# Altium PCB flipdot.PcbDoc
Units mm, origin at the board's own origin, x right, y up, seen from the top; angles counter-clockwise.
Board outline 100 x 90 mm, 2 copper layers (Top Layer, Bottom Layer); 44 components, 124 nets, 434 pads, 69 vias.
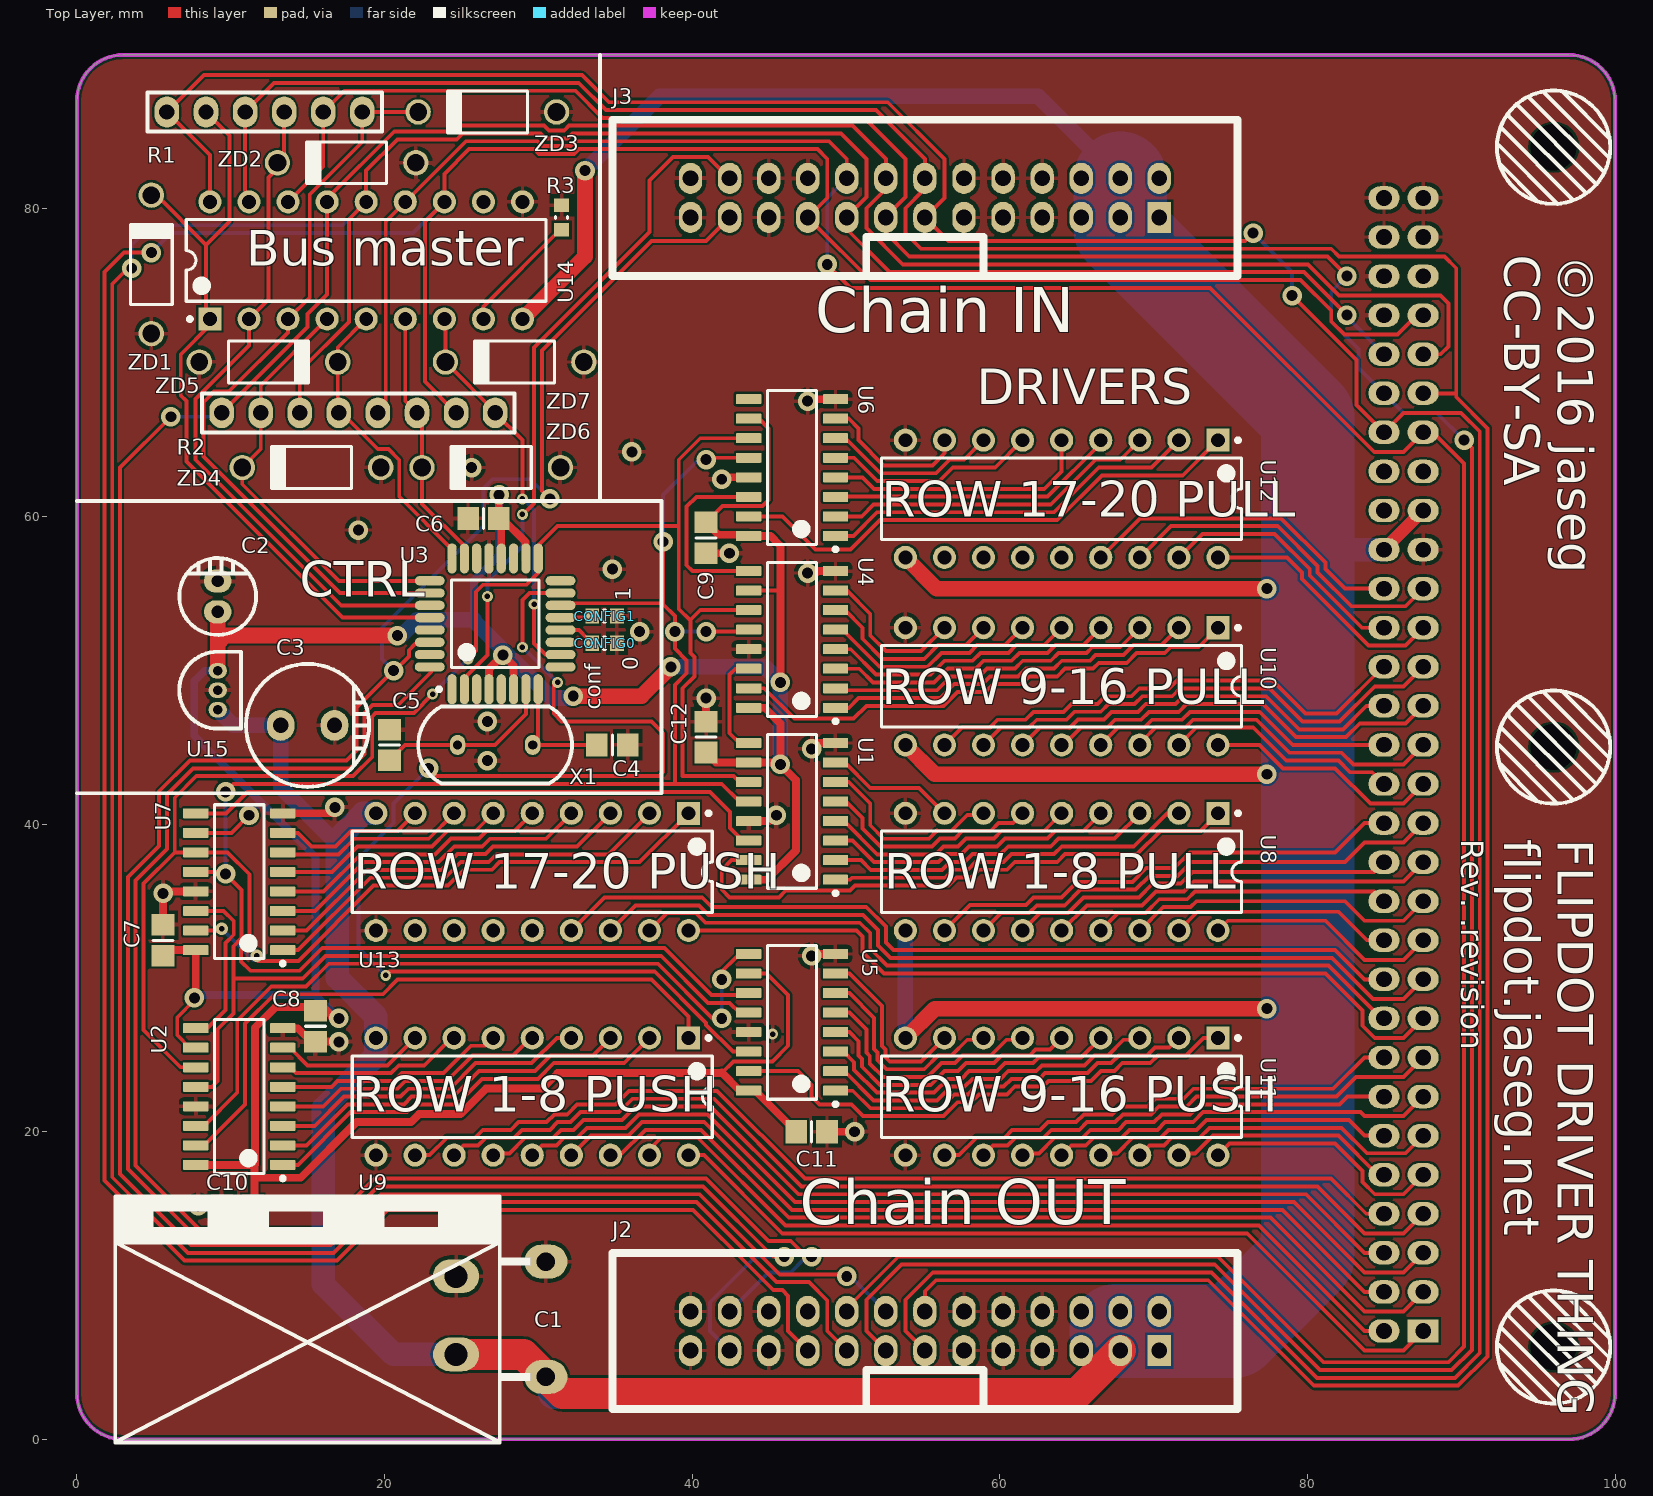
[diagram p0: Top Layer view]
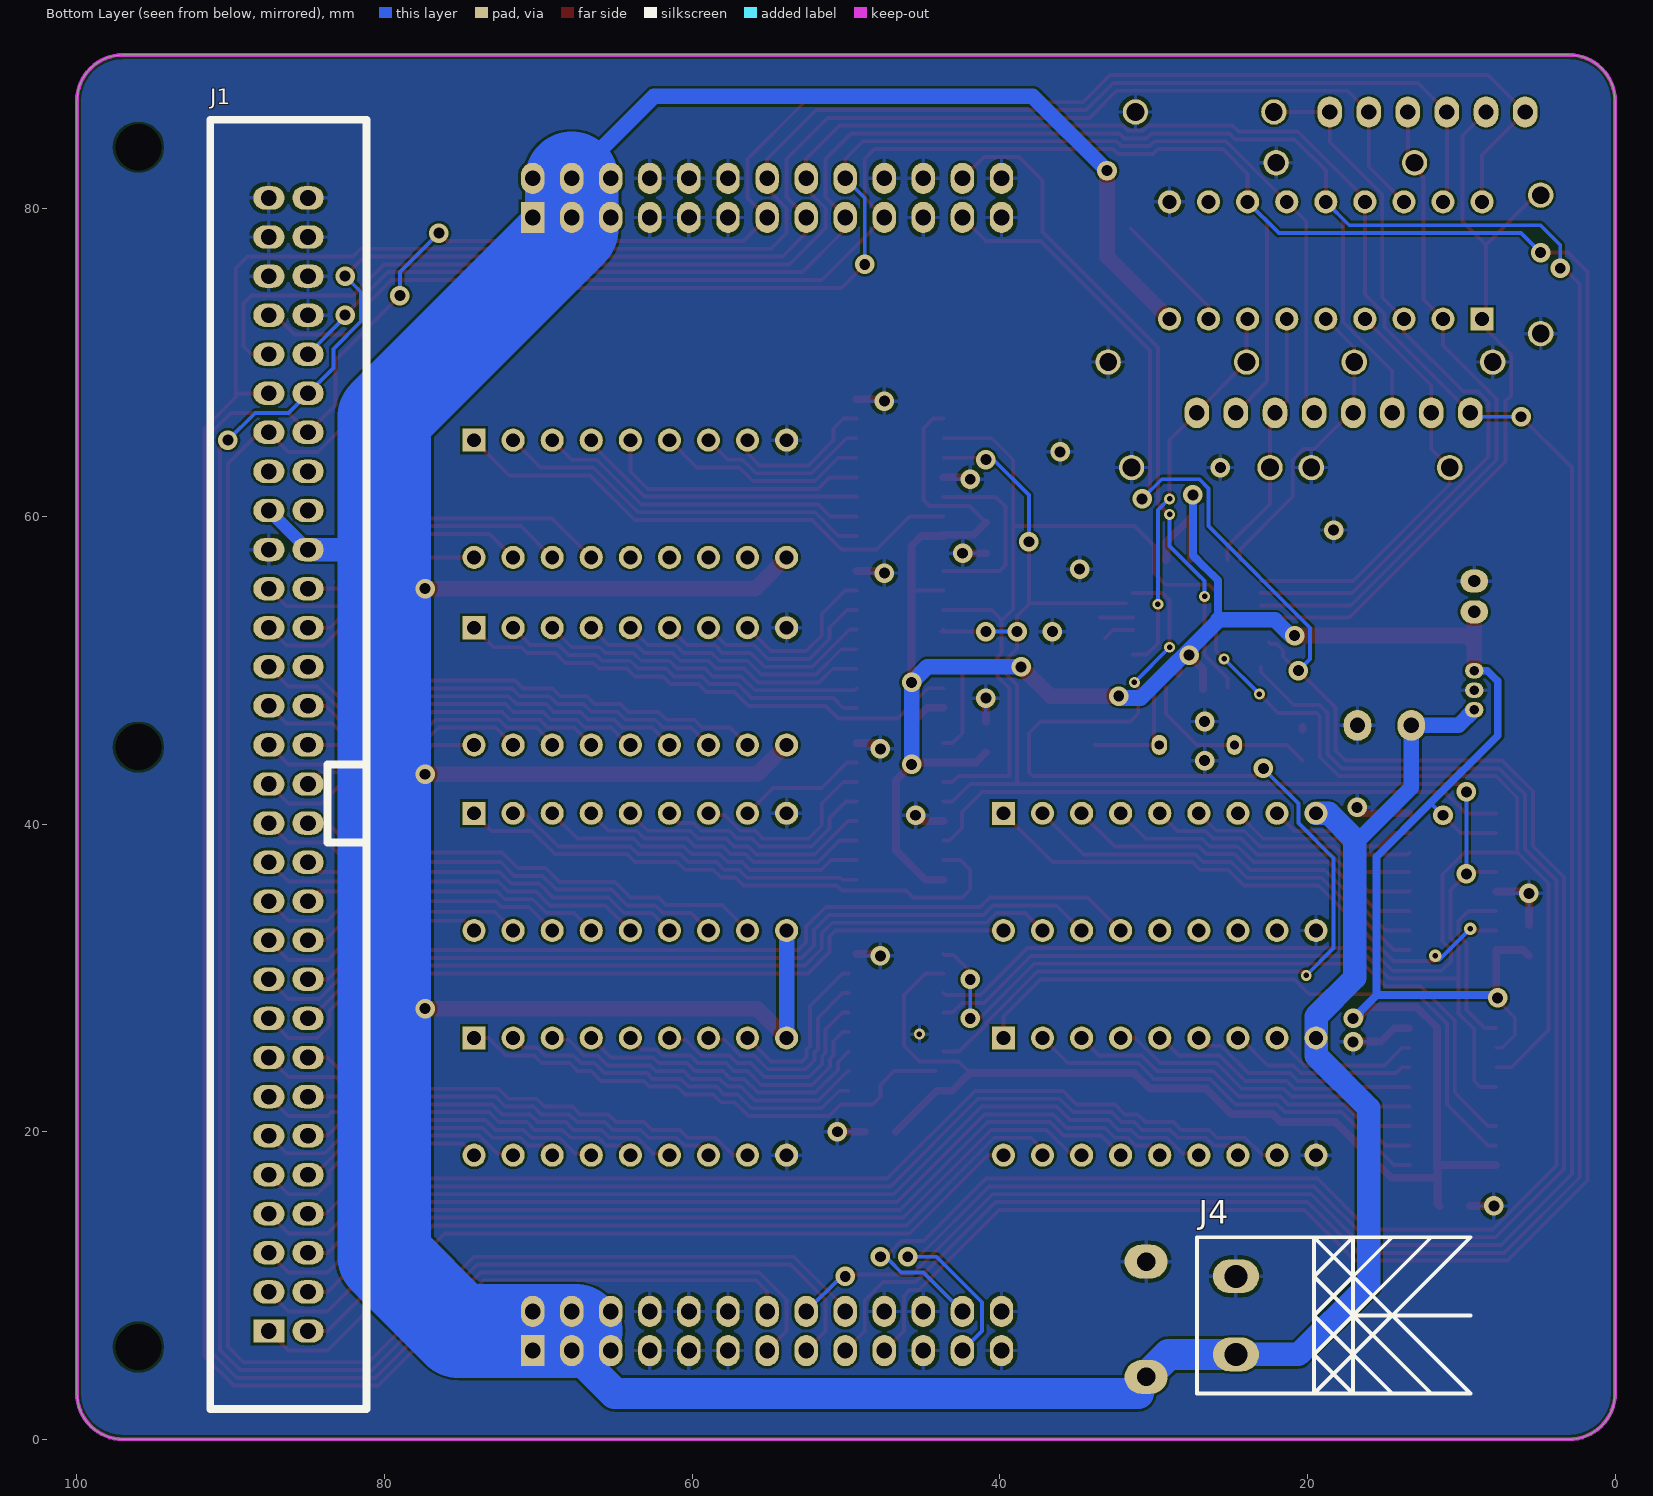
[diagram p1: Bottom Layer view, seen from below]

## Layer stack, top to bottom
Top Solder: solder mask 0.0102, Solder Resist, Dk 3.5
Top Layer: signal copper 0.0356
Dielectric1: dielectric 0.32, FR-4, Dk 4.8
Bottom Layer: signal copper 0.0356
Bottom Solder: solder mask 0.0102, Solder Resist, Dk 3.5

## Board outline
0,3 0,87 cw(c3,87) 3,90 97,90 cw(c97,87) 100,87 100,3 cw(c97,3) 97,0 3,0 cw(c3,3)

## Design rules (kind name [scope] priority, off if disabled: settings)
Clearance "VGND Polygon clearance" [InNet('VGND') AND InPoly] p1: gap=0.508
Clearance [All] p2: gap=0.152
HoleSize [All] p1: absolutevalues=TRUE maxlimit=6.35 minlimit=0.3 maxpercent=80.000 minpercent=20.000
MinimumAnnularRing AnnularRing [All] p1: minimumring=0.152
MinimumSolderMaskSliver [All] p1 off: minsoldermaskwidth=0.1
PolygonConnect [All] p1: connectstyle=Relief reliefconductorwidth=0.254 reliefentries=4 polygonreliefangle="90 Angle" airgapwidth=0.254
RoomDefinition flipdot [InComponentClass('flipdot')] p1: confinementstyle=ConfineIn formatcopy=TRUE lockcomponents=FALSE outline -101.08,-64.08 -50.28,-64.08 -50.28,-38.68 -101.08,-38.68
RoutingVias [All] p1: holewidth=0.711 width=1.27 viastyle="Through Hole" minholewidth=0.3 minwidth=0.6 maxholewidth=6.35 maxwidth=6.5
SilkToSilkClearance [All] p1 off: silktosilkclearance=0.152
SilkToSolderMaskClearance [IsPad] p1 off: minsilkscreentomaskgap=0.178 clearancetoexposedcopper=TRUE
SolderMaskExpansion [All] p1: expansion=0.13
Width SilkWidth [OnLayer('Top Overlay')] p1: maxlimit=25.4 minlimit=0.152 preferedwidth=0.254
Width HighCurrentNets [InNetClass('Power')] p2: maxlimit=6.096 minlimit=0.254 preferedwidth=0.813 minimp=50.000000 maximp=50.000000 favimp=50.000000
Width [All] p3: maxlimit=1.016 minlimit=0.152 preferedwidth=0.254 minimp=50.000000 maximp=50.000000 favimp=50.000000
26 further rules are at their usual default settings.

## Classes and differential pairs
net class Power: DVCC PGND PVCC

## Components (designator, comment, footprint, x,y, rotation, side; value= is the part's Value field where it differs from the comment)
C1 "2200u/35V" ELKO_RAD_SIDE_RM7.5_16x25 30.492,7.802 r0 top
C2 "47u/25V" ELKO_RAD_RM2.0_dia5.0 9.156,54.792 r180 top
C3 "220u/35V" ELKO_RAD_RM3.5_dia8.0 14.998,46.41 r90 top
C4 "22p" 6-0805_M 34.81,45.14 r0 top
C5 "22p" 6-0805_M 20.332,45.14 r90 top
C6 "100n" 6-0805_M 26.428,59.872 r180 top
C7 "100n" 6-0805_M 5.6,32.44 r90 top
C8 "100n" 6-0805_M 15.506,26.852 r270 top
C9 "100n" 6-0805_M 40.906,58.602 r270 top
C10 "100n" 6-0805_M 10.426,15.168 r180 top
C11 "100n" 6-0805_M 47.764,19.994 r0 top
C12 "100n" 6-0805_M 40.906,45.648 r90 top
CONFIG0 "Jumper 0603(1608)" RESC0603(1608)_N 34.302,51.744 r0 top
CONFIG1 "Jumper 0603(1608)" RESC0603(1608)_N 34.302,53.522 r180 top
J1 "Display" PINHD_2x30_100mil 86.245,42.6 r180 bottom
J2 "Chain IN" PINHD_2x13_100mil 56.4,7.04 r90 top
J3 "Chain OUT" PINHD_2x13_100mil 56.4,80.7 r90 top
J4 "CONN_PRINT_2POL" CONN_PLUG_2P_5.08 24.65,8.056 r0 bottom
R1 "100k" RNET_SIL_100mil_6P 12.204,86.288 r90 top
R2 "100k" RNET_SIL_100mil_8P 18.3,66.73 r90 top
R3 "Jumper 0603(1608)" RESC0603(1608)_N 31.508,79.43 r90 top
U1 "SN74HC595DR" D0016A_M 46.494,40.822 r180 top
U2 "SN74HC595DR" D0016A_M 10.553,22.28 r180 top
U3 "ATmega8A-AU" 32A_M 27.19,53.014 r90 top
U4 "SN74HC595DR" D0016A_M 46.494,51.998 r180 top
U5 "SN74HC595DR" D0016A_M 46.494,27.106 r180 top
U6 "SN74HC595DR" D0016A_M 46.494,63.174 r180 top
U7 "SN74HC595DR" D0016A_M 10.553,36.25 r180 top
U8 "ULN2803" PDIP-18 64.02,36.885 r270 top
U9 "UDN2981" PDIP-18 29.603,22.28 r270 top
U10 "ULN2803" PDIP-18 64.02,48.95 r270 top
U11 "UDN2981" PDIP-18 64.02,22.28 r270 top
U12 "ULN2803" PDIP-18 64.02,61.142 r270 top
U13 "UDN2981" PDIP-18 29.603,36.885 r270 top
U14 "UDN2981" PDIP-18 18.808,76.636 r90 top
U15 "LM7805" TO92 9.156,48.696 r180 top
X1 "16MHz" XTAL-HC49 27.19,45.14 r270 top
ZD1 "3.6V" FAIR-DO-41-2_V 4.838,76.382 r90 top
ZD2 "3.6V" FAIR-DO-41-2_V 17.538,82.986 r180 top
ZD3 "3.6V" FAIR-DO-41-2_V 26.682,86.288 r180 top
ZD4 "3.6V" FAIR-DO-41-2_V 15.252,63.174 r180 top
ZD5 "3.6V" FAIR-DO-41-2_V 12.458,70.032 r0 top
ZD6 "3.6V" FAIR-DO-41-2_V 26.936,63.174 r180 top
ZD7 "3.6V" FAIR-DO-41-2_V 28.46,70.032 r180 top

## Footprints (in the part's own frame and the unit in brackets; to place one, negate y for a bottom-side part, rotate by r counter-clockwise, add the part's x,y. Pads: shape width x height; smd on the part's side, far side on the other; paste and mask are expansions set on the pad)
6-0805_M [mm] "Chip Resistor, Body 2.0x1.2mm, IPC Low Density"
  rect 1.4x1.5 smd: 1(-1,0) 2(1,0)
  silkscreen extent 0,-0.65 0,0.65, body extent -1.07,-0.7 1.07,0.7, height 0.7
32A_M [mm] "Thin QFP, 32-Leads, Body 7x7mm, Pitch 0.8mm, IPC Low Density"
  oval 1.95x0.6 smd: 1(-4.25,2.8) 2(-4.25,2) 3(-4.25,1.2) 4(-4.25,0.4) 5(-4.25,-0.4) 6(-4.25,-1.2) 7(-4.25,-2) 8(-4.25,-2.8) 17(4.25,-2.8) 18(4.25,-2) 19(4.25,-1.2) 20(4.25,-0.4) 21(4.25,0.4) 22(4.25,1.2) 23(4.25,2) 24(4.25,2.8)
  oval 0.6x1.95 smd: 9(-2.8,-4.25) 10(-2,-4.25) 11(-1.2,-4.25) 12(-0.4,-4.25) 13(0.4,-4.25) 14(1.2,-4.25) 15(2,-4.25) 16(2.8,-4.25) 25(2.8,4.25) 26(2,4.25) 27(1.2,4.25) 28(0.4,4.25) 29(-0.4,4.25) 30(-1.2,4.25) 31(-2,4.25) 32(-2.8,4.25)
  silkscreen extent -4.37,-2.85 2.85,3.77, body extent -3.5,-3.5 3.5,3.5, height 1.2
CONN_PLUG_2P_5.08 [mm]
  oval 3x2.2 hole 1.5: 1(0,2.54) 2(0,-2.54)
  silkscreen extent -15.24,-5.08 2.54,5.08
D0016A_M [mm] "SOIC, 16-Leads, Body 10x4mm, Pitch 1.27mm, IPC Low Density"
  rrect15% 1.65x0.65 smd: 1(-2.825,4.445) 2(-2.825,3.175) 3(-2.825,1.905) 4(-2.825,0.635) 5(-2.825,-0.635) 6(-2.825,-1.905) 7(-2.825,-3.175) 8(-2.825,-4.445) 9(2.825,-4.445) 10(2.825,-3.175) 11(2.825,-1.905) 12(2.825,-0.635) 13(2.825,0.635) 14(2.825,1.905) 15(2.825,3.175) 16(2.825,4.445)
  silkscreen extent -2.95,-5 1.6,5.44, body extent -3,-4.95 3,4.95, height 1.59
ELKO_RAD_RM2.0_dia5.0 [mm] "Elko Radial RM2.0, 5.0mm diameter"
  oval 1.8x1.5 hole 0.8 mask+0.102: N(0,-1)
  oval 1.8x1.5 hole 0.8: P(0,1)
  silkscreen extent -2.5,-2.5 2.5,2.5
ELKO_RAD_RM3.5_dia8.0 [mm] "Elko Radial RM3.5, 8.0mm diameter"
  oval 2x1.8 hole 1 mask+0.102: N(0,-1.75)
  oval 2x1.8 hole 1: P(0,1.75)
  silkscreen extent -4,-4 4,4
ELKO_RAD_SIDE_RM7.5_16x25 [mm] "Elko RM7.5mm Radial, Mounted sideways, Body size 16mm(dia) *25mm(l)"
  oval 2.8x2.2 hole 1.2: N(0,3.75) P(0,-3.75)
  silkscreen extent -28,-8 -1,8
FAIR-DO-41-2_V [mm] "2-Leads, Axial leaded, Body 2.72x5.2mm, Pin Spacing 9mm"
  round 1.65 hole 1.15: 1(-4.5,0) 2(4.5,0)
  silkscreen extent -2.6,-1.36 2.6,1.36, body extent -4.93,-1.36 4.93,1.36, height 2.71
PDIP-18 [mm] "DIP, 18-Leads, Row Spacing 7.62mm, Pitch 2.54mm, Body 22.5x6.4mm"
  rect 1.5x1.5 hole 0.9: 1(-3.81,10.16)
  round 1.5 hole 0.9: 2(-3.81,7.62) 3(-3.81,5.08) 4(-3.81,2.54) 5(-3.81,0) 6(-3.81,-2.54) 7(-3.81,-5.08) 8(-3.81,-7.62) 9(-3.81,-10.16) 10(3.81,-10.16) 11(3.81,-7.62) 12(3.81,-5.08) 13(3.81,-2.54) 14(3.81,0) 15(3.81,2.54) 16(3.81,5.08) 17(3.81,7.62) 18(3.81,10.16)
  silkscreen extent -3.93,-11.7 2.65,11.7, body extent -3.3,-11.68 3.3,11.68, height 5.08
PINHD_2x13_100mil [mil] "2x13p 100mil Pin Header"
  rect 80x60 hole 40: 1(-50,-550)
  oval 80x60 hole 40: 2(50,-550) 3(-50,-450) 4(50,-450) 5(-50,-350) 6(50,-350) 7(-50,-250) 8(50,-250) 9(-50,-150) 10(50,-150) 11(-50,-50) 12(50,-50) 13(-50,50) 14(50,50) 15(-50,150) 16(50,150) 17(-50,250) 18(50,250) 19(-50,350) 20(50,350) 21(-50,450) 22(50,450) 23(-50,550) 24(50,550) 25(-50,650) 26(50,650)
  silkscreen extent -200,-750 200,850
PINHD_2x30_100mil [mil] "2x30p 100mil Pin Header"
  rect 80x60 hole 40: 1(-50,-1400)
  oval 80x60 hole 40: 2(50,-1400) 3(-50,-1300) 4(50,-1300) 5(-50,-1200) 6(50,-1200) 7(-50,-1100) 8(50,-1100) 9(-50,-1000) 10(50,-1000) 11(-50,-900) 12(50,-900) 13(-50,-800) 14(50,-800) 15(-50,-700) 16(50,-700) 17(-50,-600) 18(50,-600) 19(-50,-500) 20(50,-500) 21(-50,-400) 22(50,-400) 23(-50,-300) 24(50,-300) 25(-50,-200) 26(50,-200) 27(-50,-100) 28(50,-100) 29(-50,0) 30(50,0) 31(-50,100) 32(50,100) 33(-50,200) 34(50,200) 35(-50,300) 36(50,300) 37(-50,400) 38(50,400) 39(-50,500) 40(50,500) 41(-50,600) 42(50,600) 43(-50,700) 44(50,700) 45(-50,800) 46(50,800) 47(-50,900) 48(50,900) 49(-50,1000) 50(50,1000) 51(-50,1100) 52(50,1100) 53(-50,1200) 54(50,1200) 55(-50,1300) 56(50,1300) 57(-50,1400) 58(50,1400) 59(-50,1500) 60(50,1500)
  silkscreen extent -200,-1600 200,1700
RESC0603(1608)_N [mm] "Chip Resistor, Body 1.6x0.8mm, IPC Medium Density"
  rect 0.9x1 smd: 1(-0.8,0) 2(0.8,0)
  silkscreen extent -0.05,-0.4 0.05,0.4, body extent -0.85,-0.47 0.85,0.47, height 0.6
RNET_SIL_100mil_6P [mm] "Resistor network, SIL package, 100mil pin pitch, 6 pin"
  oval 2x1.6 hole 1: 1(0,6.35) 2(0,3.81) 3(0,1.27) 4(0,-1.27) 5(0,-3.81) 6(0,-6.35)
  silkscreen extent -1.27,-7.62 1.27,7.62
RNET_SIL_100mil_8P [mm] "Resistor network, SIL package, 100mil pin pitch, 8 pin"
  oval 2x1.6 hole 1: 1(0,8.89) 2(0,6.35) 3(0,3.81) 4(0,1.27) 5(0,-1.27) 6(0,-3.81) 7(0,-6.35) 8(0,-8.89)
  silkscreen extent -1.27,-10.16 1.27,10.16
TO92 [mm]
  oval 1.2x1 hole 0.6: 1(0,1.27) 2(0,0) 3(0,-1.27)
  silkscreen extent -1.5,-2.5 2.5,2.5
XTAL-HC49 [mm] "HC49 Crystal Package"
  oval 1.3x1 hole 0.6: 1(0,2.44) 2(0,-2.44)
  silkscreen extent -2.5,-5 2.5,5

## Part data
C1 C2 C3: library part CP, "Electrolytic Capacitor"
C4 C5 C6 C7 C8 C9 C10 C11 C12: library part CCer, "Ceramic Capacitor"
CONFIG0 CONFIG1 R3: library part CMP-1012-00001-1, "Jumper 0603 (1608 Metric)"
J1: library part PINHD_2x30
J2 J3: library part PINHD_2x13
R1: library part Rnet_Parallel_6, "6-pin Parallel Resistor Network"
R2: library part Rnet_Parallel_8, "8-pin Parallel Resistor Network"
U1 U2 U4 U5 U6 U7: library part CMP-0780-00037-3, "8-Bit Shift Registers With 3-State Output Registers, D0016A, LARGE T&R"
U3: library part CMP-0095-00219-1, "8-bit AVR Microcontroller, 8KB Flash, 512 Bytes EEPROM, 1KB SRAM, 32-pin TQFP, Industrial Grade (-40°C to 85°C)"
U8 U10 U12: "ULN2803 Octal Darlington Sink Driver"
U9 U11 U13 U14: "UDN2981 Octal Darlington Source Driver/Level Shifter"
U15: "5V Linear Regulator"
X1: library part XTAL
ZD1 ZD2 ZD3 ZD4 ZD5 ZD6 ZD7: library part CMP-0892-00009-1, "Zener Diode, 5.6V, 1W, 5%, -65 to 200 degC, 2-Pin DO-41, Body 2.72 x 5.2 mm, RoHS"

## Free pads (board coordinates)
  round 2.032 hole 3 unplated: 75(96,6) 75(96,45) 75(96,84)

## Via types
v1: diameter 1.27, hole 0.711, Top Layer to Bottom Layer, tented top, 56 vias
v2: diameter 0.711, hole 0.356, Top Layer to Bottom Layer, tented top, 10 vias
v3: diameter 0.813, hole 0.356, Top Layer to Bottom Layer, tented top, 2 vias
v4: diameter 1.27, hole 0.711, Top Layer to Bottom Layer, 1 vias

## Nets (pads, with @x,y where several pads share a name; then routed paths per layer and width w, separated by ;. In a path a pad name is that pad's centre, name@x,y a point inside that pad or via, vN(x,y) a via of type N, cw(c..) or ccw(c..) an arc to the next point about the centre after c; other vN are vias at no path point)
5V: J1.45
A0: R1.2 U3.28 U14.1 ZD1.2 | length 50
  Top Layer w0.254: ZD1.2 5.164,80.882 8.394,77.652 ; R1.2 9.918,84.764 9.918,79.176 8.394,77.652 ; U3.28@23.04,53.414 17.269,53.414 7.124,63.559 7.124,67.492 6.752,67.864 6.752,70.532 8.648,72.428 U14.1 8.394,73.08 8.394,77.652
A0_24V: J1.48 J2.13 J3.13 R1.1 U14.18 | length 216.4
  Top Layer w0.254: U14.18 8.648,83.494 R1.1 8.251,88.685 32.834,88.685 34.596,86.923 52.717,86.923 56.4,83.24 56.4,80.7 J3.13 56.654,77.906 75.958,77.906 v1(76.466,78.414) ; J2.13 53.86,7.04 53.86,9.072 55.638,10.85 73.759,10.85 80.617,3.992 89.587,3.992 91.198,5.603 91.198,65.504 89.972,66.73 86.245,66.73 J1.48 83.197,67.238 83.197,70.159 v1(79.006,74.35)
  Bottom Layer w0.254: v1(76.466,78.414) 79.006,75.874 v1(79.006,74.35)
A1: R1.4 U3.27 U14.2 ZD2.2 | length 44.2
  Top Layer w0.254: R1.4 13.474,83.058 12.458,82.042 12.458,74.096 U14.2 11.188,71.097 7.721,67.63 7.721,63.68 17.187,54.214 U3.27@23.04,54.214
A1_24V: J1.49 J2.14 J3.14 R1.3 U14.17 | length 210.6
  Top Layer w0.254: U14.17 10.934,80.7 R1.3 12.823,88.177 32.623,88.177 34.385,86.415 51.955,86.415 55.13,83.24 J3.14 55.13,81.208 55.038,81.208 53.86,80.03 53.86,78.414 54.876,77.398 81.546,77.398 82.054,76.89 88.912,76.89 89.674,76.128 89.674,68 ; J2.14 55.13,9.624 55.848,10.342 73.549,10.342 80.407,3.484 89.797,3.484 91.706,5.393 91.706,65.714 89.674,67.746 89.674,68 ; J1.49@87.564,68 89.674,68
A2: R1.6 U3.26 U14.3 ZD3.2 | length 49.3
  Top Layer w0.254: ZD3.2 R1.6 18.554,84.331 15.137,80.914 15.137,74.235 U14.3 13.728,71.965 9.874,68.111 8.921,68.111 8.229,67.419 8.229,63.891 17.106,55.014 U3.26@23.04,55.014
A2_24V: J1.50 J2.15 J3.15 R1.5 U14.16 | length 206.3
  Top Layer w0.254: U14.16 16.014,82.732 R1.5 17.395,87.669 32.413,87.669 34.175,85.907 51.193,85.907 53.86,83.24 53.86,80.749 52.59,79.479 J3.15 52.59,78.414 54.114,76.89 81.292,76.89 v1(82.562,75.62) ; J2.15 51.32,7.04 51.32,9.072 53.606,11.358 73.97,11.358 80.828,4.5 89.376,4.5 90.69,5.814 90.69,64.444 v1(90.182,64.952)
  Bottom Layer w0.254: v1(82.562,75.62) 81.546,74.604 81.546,72.659 83.324,70.881 83.324,69.651 J1.50 86.245,66.73 88.404,66.73 v1(90.182,64.952)
B0: R2.2 U3.25 U14.4 ZD4.2 | length 27.9
  Top Layer w0.254: U14.4 11.95,68.508 R2.2 11.95,64.372 ZD4.2 10.752,62.086 17.03,55.808 23.034,55.808 U3.25@23.04,55.814
B0_24V: J1.51 J2.16 J3.16 R2.1 U14.15 | length 216
  Top Layer w0.254: v1(6.108,66.476) 2.806,63.174 2.806,17.244 7.422,12.628 16.478,12.628 19.78,15.93 40.485,15.93 44.97,11.445 45.692,10.723 49.923,10.723 v1(50.05,10.596) ; R2.1 14.998,72.318 14.998,73.155 16.268,74.425 U14.15 16.268,80.656 20.63,85.018 24.483,85.018 24.864,85.399 30.365,85.399 30.682,85.082 31.682,85.082 31.999,85.399 50.431,85.399 52.59,83.24 J3.16 52.59,81.3 51.32,80.03 51.32,78.751 53.689,76.382 80.022,76.382 82.054,74.35 88.658,74.35 89.166,73.842 89.166,71.048 88.658,70.54 J1.51
  Bottom Layer w0.254: v1(6.108,66.476) 9.156,66.476 R2.1 ; v1(50.05,10.596) 50.304,10.596 J2.16
B1: R2.4 U3.24 U14.5 ZD5.2 | length 20.2
  Top Layer w0.254: R2.4 16.958,66.802 R2.4@16.958,66.984 ; U14.5 16.958,70.976 ZD5.2 R2.4@16.958,66.984 ; U3.24@24.39,57.164 24.39,57.846 20.958,61.278 20.958,63.674 20.252,64.38 19.562,64.38 R2.4@16.958,66.984
B1_24V: J1.52 J2.17 J3.17 R2.3 U14.14 | length 229.8
  Top Layer w0.254: v1(3.568,76.128) 3.568,76.382 2.298,75.112 2.298,17.033 7.211,12.12 16.689,12.12 19.991,15.422 40.275,15.422 44.462,11.235 45.482,10.215 47.593,10.215 48.78,9.028 48.78,7.04 J2.17 ; R2.3 14.49,69.449 17.677,72.636 17.677,79.315 U14.14 18.808,82.478 20.84,84.51 24.694,84.51 25.075,84.891 30.155,84.891 30.472,84.574 31.892,84.574 32.209,84.891 49.669,84.891 51.32,83.24 51.32,80.749 50.05,79.479 J3.17 50.05,78.663 52.839,75.874 79.768,75.874 v1(82.562,73.08)
  Bottom Layer w0.254: v1(3.568,76.128) 3.568,77.652 4.838,78.922 17.284,78.922 U14.14 ; v1(82.562,73.08) 82.562,72.953 J1.52
DATA_24V: J1.47 J2.18 J3.18 R2.5 U14.13 | length 203.1
  Top Layer w0.254: R2.5 20.078,67.238 20.078,79.176 U14.13 25.285,84.383 29.945,84.383 30.262,84.066 32.102,84.066 32.419,84.383 48.907,84.383 50.05,83.24 J3.18 ; v1(48.78,76.382) 50.304,74.858 73.672,74.858 84.34,64.19 86.245,64.19 J1.47 88.15,65.46 90.182,63.428 90.182,6.024 89.166,5.008 81.038,5.008 74.18,11.866 53.396,11.866 50.05,8.52 J2.18
  Bottom Layer w0.254: v1(48.78,76.382) 48.78,80.7 J3.18
DVCC: C2.P C6.1 C7.1 C8.1 C9.1 C10.1 C11.1 C12.1 U1.10 U1.16 U2.10 U2.16 U3.4 U3.6 U3.18 U3.20 U4.10 U4.16 U5.10 U5.16 U6.10 U6.16 U7.10 U7.16 U15.3 | length 240.5
  Top Layer w0.254: v1(7.632,28.692) 7.632,28.541 6.522,27.431 6.522,26.271 7.338,25.455 U2.10 ; U7.10 10.045,39.425 v1(11.188,40.568) ; C9.1 41.969,60.665 44.581,60.665 44.97,61.053 44.97,65.714 44.335,66.349 U6.10 ; 41.922,23.804 42.684,24.566 45.224,24.566 46.24,25.582 46.24,28.884 44.843,30.281 U5.10 ; U4.10 45.605,55.173
  Top Layer w0.508: C7.1 5.965,31.805 U7.16 7.728,28.788 v1(7.632,28.692) ; U2.16 11.538,17.835 ; C10.1 11.538,15.28 11.538,17.104 ; v1@16.59,27.441 16.679,27.441 16.014,28.106 12.919,28.106 11.569,26.756 11.569,17.866 11.538,17.835 ; U3.4 26.79,50.074 v1(27.698,50.982) 28.39,50.29 28.39,49.782 ; v1(27.444,61.396) 27.428,61.38 C6.1 ; U3.20 27.59,59.71 C6.1 ; U3.18@29.19,57.164 29.173,57.181 29.173,58.329 27.63,59.872 C6.1 ; C12.1 41.557,43.997 U1.10 v1@45.732,43.997 ; C9.1 41.698,58.81 43.669,58.81 U6.16 45.097,58.729 45.732,58.094 v1(45.732,49.204) ; U1.16 44.843,36.377 46.748,38.282 46.748,42.854 v1(45.732,43.87) 45.732,46.537 44.716,47.553 U4.16 ; C11.1 44.097,22.661 U5.16 43.099,22.661 41.939,23.821 41.922,23.838 41.922,23.804 31.251,23.804 30.247,22.8 26.604,22.8 24.941,21.137 22.239,21.137 21.731,20.629 18.173,20.629 14.546,17.002 11.64,17.002 11.538,17.104 ; 11.538,17.104 11.538,17.835
  Top Layer w1.016: U15.3 9.156,51.744 ; C2.P 9.156,51.744 ; v1(20.84,52.252) 9.664,52.252 9.156,51.744 ; v1(32.27,48.315) 36.715,48.315 v1(38.62,50.22)
  Bottom Layer w0.254: v1(11.188,40.568) 11.996,41.376 12.042,41.33
  Bottom Layer w0.508: v1(7.632,28.692) 7.824,28.884 15.506,28.884 ; U15.3 8.31,49.966 7.632,49.288 7.632,45.74 11.996,41.376 ; 12.042,41.33 15.506,37.866 15.506,28.884 ; v1@16.59,27.441 16.59,27.8 15.506,28.884 ; 25.818,53.268 25.818,55.842 26.673,56.697 26.691,56.697 27.444,57.45 v1(27.444,61.396)
  Bottom Layer w1.016: v1(20.84,52.252) 21.094,52.252 22.11,53.268 25.609,53.268 ; 25.818,53.268 25.818,53.203 30.833,48.188 32.143,48.188 v1(32.27,48.315) ; v1(38.62,50.22) 44.716,50.22 v1(45.732,49.204) v1(45.732,43.87)
  other v1: 17.03,27.36
FP2800_DATA: R2.8 U3.10 U14.7 ZD7.2 | length 25.4
  Top Layer w0.254: U14.7 23.96,72.754 ZD7.2 27.19,66.802 R2.8 28.968,64.952 v2(28.968,61.142) ; v2(29.73,54.284) 29.73,51.744 30.46,51.014 U3.10@31.34,51.014
  Bottom Layer w0.254: v2(28.968,61.142) 28.994,61.142 29.73,60.406 v2(29.73,54.284)
FP2800_STROBE: R2.6 U3.23 U14.6 ZD6.2 | length 17.3
  Top Layer w0.254: U14.6 21.348,67.492 R2.6 22.436,66.404 ZD6.2 22.436,60.816 25.19,58.062 U3.23@25.19,57.164
MISO: U3.16
MOSI: U3.15 U5.14 | length 78.9
  Top Layer w0.254: v2(20.078,30.154) 20.332,30.408 37.568,30.408 40.906,27.07 40.906,26.939 42.644,25.201 U5.14 ; v1(22.872,43.616) 23.38,43.108 37.858,43.108 38.112,43.362 38.112,45.902 37.35,46.664 31.508,46.664 31,47.172 31,49.204 v2(31.254,49.204) ; v2(28.968,51.49) 28.968,54.564 29.425,55.021 31.333,55.021 U3.15@31.34,55.014
  Bottom Layer w0.254: v2(20.078,30.154) 18.3,31.932 18.3,37.774 20.586,40.06 20.586,41.33 v1(22.872,43.616) ; v2(28.968,51.49) v2(31.254,49.204)
NetC4_1: C4.1 U3.8 X1.1 | length 8.1
  Top Layer w0.254: U3.8@29.99,48.864 29.99,45.5 X1.1 C4.1
NetC5_1: C5.1 U3.7 X1.2 | length 11.8
  Top Layer w0.254: C5.1 21.332,45.14 X1.2 27.19,45.14 29.19,47.14 U3.7@29.19,48.864
NetCONFIG0_1: CONFIG0.1 U3.12 | length 2.1
  Top Layer w0.254: U3.12@31.34,52.614 32.632,52.614 CONFIG0.1@33.171,52.075
NetCONFIG1_2: CONFIG1.2 U3.13 | length 2.2
  Top Layer w0.254: U3.13@31.34,53.414 CONFIG1.2@33.502,53.414
NetR3_1: R3.1 U14.8 | length 8
  Top Layer w0.254: U14.8 26.428,73.65 R3.1@31.508,78.73
NetU1_1: U1.1 U8.2 | length 24.1
  Top Layer w0.254: U1.1 50.261,36.377 50.388,36.504 56.444,36.504 56.964,37.024 57.921,37.024 58.429,37.532 60.25,37.532 60.758,38.04 63.52,38.04 64.028,38.548 64.444,38.548 64.447,38.546 68.709,38.546 70.859,40.695 U8.2
NetU1_2: U1.2 U8.3 | length 21.6
  Top Layer w0.254: U1.2 50.974,37.647 51.609,37.012 56.233,37.012 56.753,37.532 57.71,37.532 58.218,38.04 60.04,38.04 60.548,38.548 63.31,38.548 63.818,39.056 64.655,39.056 64.657,39.054 67.459,39.054 U8.3
NetU1_3: U1.3 U8.4 | length 19.1
  Top Layer w0.254: U1.3 50.422,38.917 51.819,37.52 56.023,37.52 56.543,38.04 57.5,38.04 58.008,38.548 59.829,38.548 60.337,39.056 63.099,39.056 63.607,39.564 64.865,39.564 64.868,39.562 65.427,39.562 U8.4
NetU1_4: U1.4 U8.5 | length 16.7
  Top Layer w0.254: U1.4 49.871,40.187 52.03,38.028 55.812,38.028 56.332,38.548 57.289,38.548 57.797,39.056 59.619,39.056 60.127,39.564 62.889,39.564 U8.5
NetU1_5: U1.5 U8.6 | length 14.7
  Top Layer w0.254: U1.5 50.006,41.457 51.066,40.397 51.066,39.71 52.24,38.536 55.602,38.536 56.122,39.056 57.079,39.056 57.587,39.564 59.408,39.564 59.916,40.072 60.857,40.072 U8.6
NetU1_6: U1.6 U8.7 | length 12.7
  Top Layer w0.254: U1.6 50.177,42.727 51.574,41.33 51.574,39.92 52.45,39.044 55.391,39.044 55.922,39.574 55.932,39.564 56.868,39.564 57.884,40.58 58.825,40.58 U8.7
NetU1_7: U1.7 U8.8 | length 8.4
  Top Layer w0.254: U1.7 49.923,43.997 51.574,42.346 54.749,42.346 U8.8
NetU1_15: U1.15 U8.1 | length 38
  Top Layer w0.254: U1.15 42.557,37.647 41.922,37.012 41.922,35.742 42.43,35.234 45.645,35.234 46.082,35.671 50.273,35.671 50.598,35.996 56.654,35.996 57.174,36.516 58.131,36.516 58.639,37.024 60.461,37.024 60.969,37.532 63.731,37.532 64.236,38.038 68.92,38.038 70.434,39.552 73.037,39.552 U8.1
NetU2_1: U2.1 U9.2 | length 27.3
  Top Layer w0.254: U2.1 14.363,17.835 17.792,21.264 21.468,21.264 21.976,21.772 24.678,21.772 26.341,23.435 29.984,23.435 31,24.451 35.584,24.451 U9.2
NetU2_2: U2.2 U9.3 | length 24.2
  Top Layer w0.254: U2.2 14.915,19.105 17.582,21.772 21.257,21.772 21.765,22.28 24.468,22.28 26.131,23.943 29.774,23.943 30.79,24.959 33.552,24.959 U9.3
NetU2_3: U2.3 U9.4 | length 21.1
  Top Layer w0.254: U2.3 15.466,20.375 17.371,22.28 21.047,22.28 21.555,22.788 24.257,22.788 25.92,24.451 29.563,24.451 31.202,26.09 U9.4
NetU2_4: U2.4 U9.5 | length 18.1
  Top Layer w0.254: U2.4 16.018,21.645 17.161,22.788 20.836,22.788 21.344,23.296 24.047,23.296 25.71,24.959 28.36,24.959 29.491,26.09 U9.5
NetU2_5: U2.5 U9.6 | length 15
  Top Layer w0.254: U2.5 16.569,22.915 16.95,23.296 20.626,23.296 21.134,23.804 23.836,23.804 25.614,25.582 26.555,25.582 U9.6
NetU2_6: U2.6 U9.7 | length 12.2
  Top Layer w0.254: U2.6 13.855,24.185 14.236,23.804 20.415,23.804 20.923,24.312 22.582,24.312 24.36,26.09 U9.7
NetU2_7: U2.7 U9.8 | length 9.8
  Top Layer w0.254: U2.7 13.855,25.455 14.998,24.312 20.205,24.312 U9.8
NetU2_15: U2.15 U9.1 | length 42
  Top Layer w0.254: U2.15 8.267,19.105 10.934,21.772 10.934,27.019 12.848,28.933 19.899,28.933 20.815,29.849 20.815,29.875 20.84,29.9 37.357,29.9 39.763,27.494 U9.1
NetU4_1: U4.1 U10.2 | length 24.5
  Top Layer w0.254: U4.1 50.177,47.553 50.812,48.188 56.139,48.188 57.04,49.089 58.861,49.089 59.369,49.597 61.191,49.597 61.699,50.105 63.52,50.105 64.028,50.613 65.85,50.613 66.219,50.982 68.04,50.982 68.687,51.629 70.509,51.629 U10.2
NetU4_2: U4.2 U10.3 | length 21.5
  Top Layer w0.254: U4.2 49.446,48.696 55.928,48.696 56.829,49.597 58.651,49.597 59.159,50.105 60.98,50.105 61.488,50.613 63.31,50.613 63.818,51.121 65.639,51.121 66.008,51.49 67.83,51.49 U10.3
NetU4_3: U4.3 U10.4 | length 19.1
  Top Layer w0.254: U4.3 50.859,50.093 51.748,49.204 55.718,49.204 56.619,50.105 58.44,50.105 58.948,50.613 60.77,50.613 61.278,51.121 63.099,51.121 63.607,51.629 65.429,51.629 U10.4
NetU4_4: U4.4 U10.5 | length 16.6
  Top Layer w0.254: U4.4 50.308,51.363 51.959,49.712 55.507,49.712 56.408,50.613 58.23,50.613 58.738,51.121 60.559,51.121 61.067,51.629 62.889,51.629 U10.5
NetU4_5: U4.5 U10.6 | length 14.2
  Top Layer w0.254: U4.5 49.756,52.633 52.169,50.22 55.297,50.22 56.198,51.121 58.019,51.121 58.527,51.629 60.349,51.629 U10.6
NetU4_6: U4.6 U10.7 | length 12.2
  Top Layer w0.254: U4.6 49.923,53.903 51.066,52.76 51.066,52.042 52.38,50.728 55.086,50.728 55.987,51.629 57.809,51.629 U10.7
NetU4_7: U4.7 U10.8 | length 10.2
  Top Layer w0.254: U4.7 50.062,55.173 51.574,53.661 51.574,52.252 52.59,51.236 54.876,51.236 U10.8
NetU4_15: U4.15 U10.1 | length 33.8
  Top Layer w0.254: U4.15 44.676,48.823 46.652,46.847 50.487,46.847 51.32,47.68 56.349,47.68 57.25,48.581 59.072,48.581 59.58,49.089 61.401,49.089 61.909,49.597 63.731,49.597 64.239,50.105 66.06,50.105 66.429,50.474 68.251,50.474 68.898,51.121 70.719,51.121 71.088,51.49 72.91,51.49 U10.1
NetU5_1: U5.1 U11.2 | length 24.2
  Top Layer w0.254: U5.1@49.827,22.661 50.438,22.661 51.581,21.518 56.139,21.518 57.04,22.419 57.921,22.419 58.429,22.927 60.25,22.927 60.758,23.435 62.58,23.435 62.949,23.804 65.711,23.804 66.358,24.451 67.239,24.451 67.747,24.959 69.568,24.959 70.076,25.467 71.017,25.467 U11.2
NetU5_2: U5.2 U11.3 | length 21.7
  Top Layer w0.254: U5.2@49.827,23.931 49.887,23.931 51.792,22.026 55.928,22.026 56.829,22.927 57.71,22.927 58.218,23.435 60.04,23.435 60.548,23.943 62.369,23.943 62.738,24.312 65.5,24.312 66.147,24.959 67.028,24.959 68.044,25.975 68.985,25.975 U11.3
NetU5_3: U5.3 U11.4 | length 19.6
  Top Layer w0.254: U5.3@49.827,25.201 49.836,25.201 50.525,24.512 50.525,24.011 52.002,22.534 55.718,22.534 56.619,23.435 57.5,23.435 58.008,23.943 59.829,23.943 60.337,24.451 62.159,24.451 62.528,24.82 65.29,24.82 U11.4
NetU5_4: U5.4 U11.5 | length 17.7
  Top Layer w0.254: U5.4@49.827,26.471 50.217,26.471 50.812,25.876 50.812,24.943 51.033,24.722 51.033,24.222 52.213,23.042 55.507,23.042 56.408,23.943 57.289,23.943 57.797,24.451 59.619,24.451 60.127,24.959 61.948,24.959 62.317,25.328 63.258,25.328 U11.5
NetU5_5: U5.5 U11.6 | length 15.6
  Top Layer w0.254: U5.5@49.827,27.741 50.217,27.741 51.32,26.638 51.32,25.154 51.541,24.933 51.541,24.432 52.423,23.55 55.297,23.55 56.198,24.451 57.079,24.451 57.587,24.959 59.408,24.959 60.424,25.975 61.365,25.975 U11.6
NetU5_6: U5.6 U11.7 | length 13.5
  Top Layer w0.254: U5.6@49.827,29.011 50.217,29.011 51.828,27.4 51.828,25.364 52.049,25.143 52.049,24.643 52.634,24.058 55.086,24.058 55.987,24.959 56.868,24.959 57.884,25.975 58.825,25.975 U11.7
NetU5_7: U5.7 U11.8 | length 11.4
  Top Layer w0.254: U5.7@49.827,30.281 50.217,30.281 52.336,28.162 52.336,25.575 52.557,25.354 52.557,24.853 52.844,24.566 54.876,24.566 U11.8
NetU5_15: U5.15 U11.1 | length 33.8
  Top Layer w0.254: U5.15@44.177,23.931 46.875,23.931 47.764,23.042 47.764,22.28 48.272,21.772 50.355,21.772 51.117,21.01 56.349,21.01 57.25,21.911 58.131,21.911 58.639,22.419 60.461,22.419 60.969,22.927 62.79,22.927 63.159,23.296 65.921,23.296 66.568,23.943 67.449,23.943 67.957,24.451 69.779,24.451 70.287,24.959 72.108,24.959 73.239,26.09 U11.1
NetU6_1: U6.1 U12.2 | length 24.9
  Top Layer w0.254: U6.1 50.475,58.729 52.011,60.265 63.52,60.265 66.429,63.174 69.862,63.174 U12.2
NetU6_2: U6.2 U12.3 | length 21.8
  Top Layer w0.254: U6.2 51.026,59.999 51.8,60.773 63.31,60.773 66.219,63.682 67.83,63.682 U12.3
NetU6_3: U6.3 U12.4 | length 18.9
  Top Layer w0.254: U6.3 49.331,61.281 63.099,61.281 66.56,64.742 U12.4
NetU6_4: U6.4 U12.5 | length 17.5
  Top Layer w0.254: U6.4 51.07,62.539 51.82,61.789 62.889,61.789 64.02,62.92 U12.5
NetU6_5: U6.5 U12.6 | length 13.9
  Top Layer w0.254: U6.5 50.518,63.809 52.03,62.297 56.063,62.297 56.94,63.174 59.702,63.174 U12.6
NetU6_6: U6.6 U12.7 | length 11.5
  Top Layer w0.254: U6.6 49.967,65.079 52.241,62.805 55.852,62.805 56.729,63.682 57.67,63.682 U12.7
NetU6_7: U6.7 U12.8 | length 10
  Top Layer w0.254: U6.7 50.177,66.349 50.812,65.714 50.812,64.952 52.451,63.313 55.61,63.313 56.4,64.103 U12.8
NetU6_15: U6.15 U12.1 | length 34.4
  Top Layer w0.254: U6.15 45.859,59.999 48.018,57.84 50.304,57.84 52.221,59.757 63.731,59.757 66.64,62.666 71.894,62.666 U12.1
NetU7_1: U7.1 U13.2 | length 27.5
  Top Layer w0.254: U7.1 14.386,31.805 19.085,36.504 23.924,36.504 24.952,37.532 26.774,37.532 27.27,38.028 34.556,38.028 U13.2
NetU7_2: U7.2 U13.3 | length 24.5
  Top Layer w0.254: U7.2 14.938,33.075 18.875,37.012 23.714,37.012 24.742,38.04 26.563,38.04 27.059,38.536 32.524,38.536 U13.3
NetU7_3: U7.3 U13.4 | length 21.4
  Top Layer w0.254: U7.3 15.489,34.345 18.664,37.52 23.503,37.52 24.531,38.548 26.353,38.548 26.849,39.044 30.492,39.044 U13.4
NetU7_4: U7.4 U13.5 | length 18.3
  Top Layer w0.254: U7.4 16.041,35.615 18.454,38.028 23.293,38.028 24.321,39.056 26.142,39.056 26.638,39.552 28.46,39.552 U13.5
NetU7_5: U7.5 U13.6 | length 15.3
  Top Layer w0.254: U7.5 16.592,36.885 18.243,38.536 23.082,38.536 24.11,39.564 25.932,39.564 U13.6
NetU7_6: U7.6 U13.7 | length 12.3
  Top Layer w0.254: U7.6 13.505,38.028 17.017,38.028 18.033,39.044 22.872,39.044 U13.7
NetU7_7: U7.7 U13.8 | length 9.9
  Top Layer w0.254: U7.7 14.363,39.425 15.252,38.536 16.807,38.536 17.823,39.552 20.84,39.552 U13.8
NetU7_15: U7.15 U13.1 | length 36.9
  Top Layer w0.254: U7.15 9.283,33.075 v3(9.41,33.202) ; v3@11.696,31.17 11.767,31.099 14.399,31.099 19.296,35.996 24.135,35.996 25.163,37.024 26.984,37.024 27.48,37.52 36.588,37.52 U13.1
  Bottom Layer w0.254: v3(9.41,33.202) 11.442,31.17 v3@11.696,31.17
  other v3: 11.696,31.424
PGND: C1.N C2.N C3.N C4.2 C5.2 C6.2 C7.2 C8.2 C9.2 C10.2 C11.2 C12.2 CONFIG0.2 CONFIG1.1 J1.41 J1.54 J1.55 J1.56 J1.57 J1.58 J1.59 J1.60 J2.7 J2.8 J2.9 J2.10 J2.11 J2.12 J2.20 J2.21 J2.22 J2.25 J2.26 J3.7 J3.8 J3.9 J3.10 J3.11 J3.12 J3.20 J3.21 J3.22 J3.25 J3.26 J4.2 R3.2 U1.8 U1.13 U2.8 U2.13 U3.3 U3.5 U3.21 U4.8 U4.13 U5.8 U5.13 U6.8 U6.13 U7.8 U7.13 U8.9 U9.10 U10.9 U11.10 U12.9 U13.10 U14.10 U15.2 ZD1.1 ZD2.1 ZD3.1 ZD4.1 ZD5.1 ZD6.1 ZD7.1 | length 29.6
  Top Layer w0.508: C7.2 v1(5.6,35.488) 5.727,35.615 U7.13 ; v1(7.886,15.168) C10.2 ; U2.8 14.363,26.725 C8.2@15.236,25.852 ; U7.8 16.649,40.695 16.776,40.822 v1(16.776,41.076) ; C8.2 v1@17.014,25.852 ; v1(17.03,25.836) v1@17.046,25.852 ; C5.2 C5.2@20.332,46.298 ; C12.2 v1(40.906,48.188) ; C9.2 v1(42.414,57.602) ; v1(41.922,62.412) 42.049,62.539 U6.13 ; U1.13 45.011,40.187 45.392,40.568 v1(45.478,40.568) ; v1(47.51,67.492) 47.637,67.619 U6.8 ; v1(47.764,31.424) 47.637,31.551 U5.8 ; v1(47.764,44.886) 47.764,45.14 47.637,45.267 U1.8 ; v1@47.764,56.062 48.145,56.443 U4.8 ; C11.2 v1(50.558,19.994)
  Bottom Layer w0.508: v1(42.414,57.602) v1@42.43,57.586
  other v1: 26.682,44.124 26.682,46.664 36.588,52.506 47.51,56.316 34.81,56.57 18.3,59.11 25.666,63.174 36.08,64.19
  other v2: 45.224,26.344
PVCC: C1.P C3.P J1.42 J1.43 J2.1 J2.2 J2.3 J2.4 J2.5 J2.6 J3.1 J3.2 J3.3 J3.4 J3.5 J3.6 J4.1 U8.10 U9.9 U10.10 U11.9 U12.10 U13.9 U14.9 U15.1 | length 384.8
  Top Layer w0.813: J1.42 J1.43
  Top Layer w1.016: U14.9 33.032,76.89 v1(33.032,82.478) ; U11.9 55.765,27.995 v1(77.355,27.995) ; U10.10 55.765,43.235 v1(77.355,43.235) ; U12.10 55.892,55.3 v1(77.355,55.3)
  Top Layer w2.032: J4.1 29.028,5.516 C1.P 31.568,2.976 65.036,2.976 J2.3
  Bottom Layer w0.813: J1.42 J1.43
  Bottom Layer w1.016: U15.1 10.172,46.41 C3.P 13.248,42.374 16.928,38.694 16.928,38.999 ; v1(33.032,82.478) 37.858,87.304 62.496,87.304 J3.4 ; U11.9 U8.10 ; v1(77.355,27.995) 78.498,29.138 ; v1(77.355,55.3) 78.752,55.3 79.006,55.554 ; 79.768,29.392 80.022,29.138
  Bottom Layer w1.524: 16.928,38.694 16.928,30.002 19.443,27.487 U9.9 19.443,24.947 16.014,21.518 16.014,10.088 20.586,5.516 J4.1 ; 16.928,38.999 18.625,40.695 U13.9 ; 80.022,55.935 81.927,57.84 J1.42
  Bottom Layer w2.032: J4.1 29.028,5.516 C1.P ; C1.P@31,2.976 65.036,2.976 J2.3
  Bottom Layer w6.096: 67.576,7.04 75.196,7.04 80.022,11.866 80.022,29.138 80.022,55.554 ; J3.4 J3.3 67.83,78.668 80.022,66.476 80.022,55.935
RESET1: J1.21 U8.18 | length 15.2
  Top Layer w0.254: U8.18 74.815,33.71 81.165,33.71 83.705,31.17 86.245,31.17 J1.21
RESET2: J1.22 U8.17 | length 14.6
  Top Layer w0.254: U8.17 72.861,34.296 82.016,34.296 83.872,32.44 J1.22
RESET3: J1.23 U8.16 | length 20.3
  Top Layer w0.254: U8.16 70.624,34.599 72.395,34.599 72.776,34.98 82.435,34.98 83.705,33.71 86.245,33.71 J1.23
RESET4: J1.24 U8.15 | length 19.7
  Top Layer w0.254: U8.15 67.691,34.206 69.462,34.206 70.363,35.107 72.184,35.107 72.692,35.615 84.34,35.615 J1.24
RESET5: J1.25 U8.14 | length 25.3
  Top Layer w0.254: U8.14 65.659,34.714 69.251,34.714 70.152,35.615 71.974,35.615 72.609,36.25 86.245,36.25 J1.25
RESET6: J1.26 U8.13 | length 25.3
  Top Layer w0.254: U8.13 62.611,34.206 64.433,34.206 65.449,35.222 69.041,35.222 69.942,36.123 71.763,36.123 72.525,36.885 84.34,36.885 J1.26
RESET7: J1.27 U8.12 | length 31.5
  Top Layer w0.254: U8.12 60.083,34.218 61.905,34.218 62.401,34.714 64.222,34.714 65.238,35.73 68.83,35.73 69.731,36.631 71.553,36.631 72.442,37.52 82.435,37.52 83.705,38.79 86.245,38.79 J1.27
RESET8: J1.28 U8.11 | length 31.5
  Top Layer w0.254: U8.11 58.051,34.726 61.694,34.726 62.19,35.222 64.012,35.222 65.028,36.238 68.62,36.238 69.521,37.139 71.342,37.139 72.358,38.155 81.8,38.155 83.705,40.06 J1.28
RESET9: J1.29 U10.18 | length 15.4
  Top Layer w0.254: U10.18 76.887,45.14 78.411,43.616 81.8,43.616 84.086,41.33 86.245,41.33 J1.29
RESET10: J1.30 U10.17 | length 15.3
  Top Layer w0.254: U10.17 72.771,46.271 76.474,46.271 78.621,44.124 82.01,44.124 82.772,43.362 84.213,43.362 J1.30
RESET11: J1.31 U10.16 | length 20.9
  Top Layer w0.254: U10.16 69.354,45.394 69.354,45.509 70.116,46.271 72.053,46.271 72.561,46.779 76.685,46.779 78.832,44.632 82.221,44.632 82.983,43.87 86.245,43.87 J1.31
RESET12: J1.32 U10.15 | length 20.2
  Top Layer w0.254: U10.15 67.691,46.271 69.398,46.271 69.906,46.779 71.842,46.779 72.35,47.287 76.895,47.287 79.042,45.14 J1.32
RESET13: J1.33 U10.14 | length 26.3
  Top Layer w0.254: U10.14 64.143,45.14 65.286,46.283 66.985,46.283 67.481,46.779 69.187,46.779 69.695,47.287 71.632,47.287 72.14,47.795 77.106,47.795 79.253,45.648 82.509,45.648 83.398,46.537 86.372,46.537 J1.33
RESET14: J1.34 U10.13 | length 26.4
  Top Layer w0.254: U10.13 62.611,46.271 64.488,46.271 64.522,46.237 65.076,46.791 66.774,46.791 67.27,47.287 68.977,47.287 69.485,47.795 71.421,47.795 71.929,48.303 77.316,48.303 79.463,46.156 82.299,46.156 83.823,47.68 J1.34
RESET15: J1.35 U10.12 | length 32.5
  Top Layer w0.254: U10.12 60.071,46.271 61.893,46.271 62.401,46.779 64.345,46.779 64.865,47.299 66.564,47.299 67.06,47.795 68.766,47.795 69.274,48.303 71.211,48.303 71.719,48.811 77.526,48.811 79.673,46.664 82.089,46.664 84.375,48.95 86.245,48.95 J1.35
RESET16: J1.36 U10.11 | length 32.5
  Top Layer w0.254: U10.11 57.531,46.271 59.353,46.271 59.861,46.779 61.682,46.779 62.19,47.287 64.135,47.287 64.655,47.807 66.353,47.807 66.849,48.303 68.556,48.303 69.064,48.811 71,48.811 71.508,49.319 77.737,49.319 79.884,47.172 81.878,47.172 84.926,50.22 J1.36
RESET17: J1.37 U12.18 | length 16.4
  Top Layer w0.254: U12.18 78.665,57.332 79.641,56.356 79.641,55.935 83.959,51.617 86.372,51.617 J1.37
RESET18: J1.38 U12.17 | length 17.3
  Top Layer w0.254: J1.38 83.534,52.76 80.149,56.145 80.149,56.566 77.859,58.856 73.164,58.856 U12.17 ; U12.17 71.803,57.332 71.64,57.169 U12.17
RESET19: J1.39 U12.16 | length 22.1
  Top Layer w0.254: U12.16 71.132,59.364 78.07,59.364 80.657,56.777 80.657,56.356 82.856,54.157 86.372,54.157 J1.39
RESET20: J1.40 U12.15 | length 21.6
  Top Layer w0.254: U12.15 69.1,59.872 78.28,59.872 81.165,56.987 81.165,56.566 82.431,55.3 J1.40
SCK: U1.11 U2.11 U3.17 U4.11 U5.11 U6.11 U7.11 | length 146.7
  Top Layer w0.254: U2.11 6.743,24.185 4.33,26.598 4.33,36.123 6.362,38.155 ; v2(23.126,48.442) 21.905,47.221 21.419,47.221 19.424,47.221 19.201,46.998 19.201,44.35 17.959,43.108 7.762,43.108 6.362,41.708 6.362,38.155 ; v2(25.412,50.728) 25.945,51.261 25.945,51.747 25.945,55.097 26.402,55.554 29.222,55.554 29.99,56.322 29.99,58.1 31.254,59.364 39.128,59.364 ; 39.868,53.246 40.525,53.903 U4.11 ; U5.11 43.542,28.884 41.247,28.884 38.199,31.932 15.95,31.932 14.475,30.457 11.295,30.457 10.68,31.072 10.68,31.845 11.213,32.378 11.213,36.733 9.791,38.155 U7.11 6.362,38.155 ; U1.11 43.065,42.727 42.684,43.108 39.382,43.108 39.382,48.827 40.144,49.589 40.144,50.851 39.89,51.105 39.89,53.224 39.128,53.986 39.128,63.682 40.525,65.079 U6.11
  Bottom Layer w0.254: v2(23.126,48.442) v2(25.412,50.728)
SET1: J1.1 U9.18 | length 53.5
  Top Layer w0.254: U9.18 40.775,18.47 45.855,13.39 76.085,13.39 83.705,5.77 86.245,5.77 J1.1
SET2: J1.2 U9.17 | length 53.6
  Top Layer w0.254: U9.17 37.223,18.851 37.973,19.601 40.363,19.601 46.066,13.898 76.847,13.898 83.705,7.04 J1.2
SET3: J1.3 U9.16 | length 58.9
  Top Layer w0.254: U9.16 35.318,18.47 36.957,20.109 40.573,20.109 46.276,14.406 77.609,14.406 83.705,8.31 86.245,8.31 J1.3
SET4: J1.4 U9.15 | length 58.3
  Top Layer w0.254: U9.15 33.413,19.74 35.87,19.74 36.747,20.617 40.784,20.617 46.487,14.914 78.371,14.914 83.705,9.58 J1.4
SET5: J1.5 U9.14 | length 63.8
  Top Layer w0.254: U9.14 30.226,19.093 31.167,19.093 31.675,19.601 32.508,19.601 33.155,20.248 35.659,20.248 36.536,21.125 40.994,21.125 46.697,15.422 79.133,15.422 83.705,10.85 86.245,10.85 J1.5
SET6: J1.6 U9.13 | length 63.2
  Top Layer w0.254: U9.13 27.178,18.585 28.119,18.585 29.135,19.601 30.956,19.601 31.464,20.109 32.298,20.109 32.945,20.756 35.449,20.756 36.326,21.633 41.204,21.633 46.907,15.93 79.895,15.93 83.705,12.12 J1.6
SET7: J1.7 U9.12 | length 68.7
  Top Layer w0.254: U9.12 25.146,19.093 26.087,19.093 26.595,19.601 28.416,19.601 28.924,20.109 30.746,20.109 31.254,20.617 32.087,20.617 32.734,21.264 35.238,21.264 36.115,22.141 41.415,22.141 47.118,16.438 80.657,16.438 83.705,13.39 86.245,13.39 J1.7
SET8: J1.8 U9.11 | length 68
  Top Layer w0.254: U9.11 22.924,18.47 24.055,19.601 25.876,19.601 26.384,20.109 28.206,20.109 28.714,20.617 30.535,20.617 31.043,21.125 31.877,21.125 32.524,21.772 35.028,21.772 35.905,22.649 41.625,22.649 47.328,16.946 81.537,16.946 83.823,14.66 J1.8
SET9: J1.9 U11.18 | length 16
  Top Layer w0.254: U11.18 74.942,19.232 81.8,19.232 83.578,17.454 83.578,16.727 84.375,15.93 86.245,15.93 J1.9
SET10: J1.10 U11.17 | length 14.9
  Top Layer w0.254: U11.17 71.755,18.585 72.696,18.585 73.851,19.74 82.01,19.74 84.55,17.2 J1.10
SET11: J1.11 U11.16 | length 20.3
  Top Layer w0.254: U11.16 69.723,19.093 70.664,19.093 71.172,19.601 72.993,19.601 73.64,20.248 82.221,20.248 83.872,18.597 86.372,18.597 J1.11
SET12: J1.12 U11.15 | length 19.8
  Top Layer w0.254: U11.15 66.675,18.585 67.616,18.585 68.632,19.601 70.453,19.601 70.961,20.109 72.783,20.109 73.43,20.756 82.689,20.756 83.705,19.74 J1.12
SET13: J1.13 U11.14 | length 25.3
  Top Layer w0.254: U11.14 64.643,19.093 65.584,19.093 66.092,19.601 67.913,19.601 68.421,20.109 70.243,20.109 70.751,20.617 72.572,20.617 73.219,21.264 83.451,21.264 83.705,21.01 86.245,21.01 J1.13
SET14: J1.14 U11.13 | length 25.1
  Top Layer w0.254: U11.13 61.595,18.585 62.536,18.585 63.552,19.601 65.373,19.601 65.881,20.109 67.703,20.109 68.211,20.617 70.032,20.617 70.54,21.125 72.362,21.125 73.009,21.772 82.094,21.772 82.602,22.28 J1.14
SET15: J1.15 U11.12 | length 31.2
  Top Layer w0.254: U11.12 59.563,19.093 60.504,19.093 61.012,19.601 62.833,19.601 63.341,20.109 65.163,20.109 65.671,20.617 67.492,20.617 68,21.125 69.822,21.125 70.33,21.633 72.151,21.633 72.798,22.28 81.883,22.28 83.153,23.55 86.245,23.55 J1.15
SET16: J1.16 U11.11 | length 31.2
  Top Layer w0.254: U11.11 57.341,18.47 58.472,19.601 60.293,19.601 60.801,20.109 62.623,20.109 63.131,20.617 64.952,20.617 65.46,21.125 67.282,21.125 67.79,21.633 69.611,21.633 70.119,22.141 71.941,22.141 72.588,22.788 81.673,22.788 83.705,24.82 J1.16
SET17: J1.17 U13.18 | length 52.3
  Top Layer w0.254: U13.18 50.685,33.075 51.066,32.694 51.066,31.678 52.463,30.281 81.165,30.281 83.578,27.868 83.578,26.887 84.375,26.09 86.245,26.09 J1.17
SET18: J1.18 U13.17 | length 51.7
  Top Layer w0.254: U13.17 38.354,34.206 40.231,34.206 40.854,33.583 50.895,33.583 51.574,32.904 51.574,31.888 52.673,30.789 81.375,30.789 84.804,27.36 J1.18
SET19: J1.19 U13.16 | length 57.2
  Top Layer w0.254: U13.16 36.322,34.714 40.442,34.714 41.065,34.091 51.106,34.091 52.082,33.115 52.082,32.099 52.884,31.297 81.586,31.297 84.253,28.63 86.245,28.63 J1.19
SET20: J1.20 U13.15 | length 56.5
  Top Layer w0.254: U13.15 34.29,35.222 40.652,35.222 41.275,34.599 51.316,34.599 52.59,33.325 52.59,32.309 53.094,31.805 81.8,31.805 83.705,29.9 J1.20
SH1: U1.14 U7.9 | length 38.5
  Top Layer w0.254: U7.9 9.704,40.695 11.101,42.092 41.16,42.092 42.463,40.789 42.463,39.733 43.279,38.917 U1.14
SH2: U1.9 U4.14 | length 6.7
  Top Layer w0.254: U1.9 43.065,45.267 42.43,45.902 42.43,49.712 42.811,50.093 U4.14
SH3: U4.9 U6.14 | length 12.3
  Top Layer w0.254: U4.9 40.017,56.443 39.636,56.824 39.636,60.634 40.271,61.269 U6.14
SH4: U2.9 U7.14 | length 11.2
  Top Layer w0.254: U2.9 8.485,26.725 9.664,27.904 9.664,32.266 10.197,32.799 10.197,33.685 9.537,34.345 U7.14
SH5: U2.14 U5.9 | length 47.7
  Top Layer w0.254: U2.14 8.267,20.375 10.426,22.534 10.426,27.229 12.638,29.441 14.896,29.441 16.371,30.916 37.778,30.916 41.334,27.36 v1(41.922,27.36) ; v1@41.795,30.281 43.009,31.495 43.613,31.495 U5.9
  Bottom Layer w0.254: v1(41.922,27.36) v1(41.922,29.9)
STR_24V: J1.53 J2.19 J3.19 R2.7 U14.12 | length 229
  Top Layer w0.254: v1(4.838,77.144) 3.06,77.144 1.79,75.874 1.79,16.823 7.001,11.612 16.899,11.612 20.201,14.914 40.064,14.914 43.954,11.024 45.271,9.707 45.859,9.707 46.24,9.326 46.24,7.04 J2.19 ; R2.7 22.618,68.762 22.618,79.176 U14.12 23.888,82.268 25.495,83.875 29.734,83.875 30.051,83.558 32.313,83.558 32.63,83.875 48.145,83.875 48.78,83.24 48.78,80.7 J3.19 47.51,79.176 47.602,79.084 47.856,79.084 51.574,75.366 79.558,75.366 81.546,73.378 81.546,72.659 82.395,71.81 85.864,71.81 87.134,73.08 J1.53
  Bottom Layer w0.254: v1(4.838,77.144) 6.108,78.414 21.856,78.414 U14.12
STROBE: U1.12 U2.12 U3.14 U4.12 U5.12 U6.12 U7.12 | length 131.5
  Top Layer w0.254: U2.12 8.775,22.915 9.156,23.296 9.156,26.678 10.172,27.694 10.172,29.9 ; U7.12 9.537,36.885 v1(9.664,36.758) 10.705,35.717 10.705,32.589 10.172,32.055 10.172,29.9 ; v1(9.664,42.092) 10.172,42.6 38.874,42.6 ; U3.14@31.791,54.353 38.043,54.353 38.112,54.284 ; v1(38.112,58.348) 38.112,54.284 ; v1(40.906,52.506) 43.796,52.506 U4.12 ; v1(40.906,63.682) 41.033,63.809 U6.12 ; U5.12 43.065,27.741 42.43,28.376 41.037,28.376 37.989,31.424 16.16,31.424 14.685,29.949 10.221,29.949 10.172,29.9 ; U1.12 43.065,41.457 41.922,42.6 38.874,42.6 ; 38.112,54.284 38.874,53.522 v4(38.874,52.506) 38.874,51.403 39.636,50.641 39.636,49.799 38.874,49.037 38.874,42.6
  Bottom Layer w0.254: v1(9.664,36.758) v1(9.664,42.092) ; v1(38.112,58.348) 38.112,61.396 40.398,63.682 v1(40.906,63.682) ; v4(38.874,52.506) v1(40.906,52.506)
SYNC_IN: J2.24 U3.32 | length 103.3
  Top Layer w0.254: U3.32@23.04,50.214 23.04,49.88 20.889,47.729 19.214,47.729 18.693,47.208 18.693,44.561 17.748,43.616 7.552,43.616 5.854,41.918 5.854,38.365 3.822,36.333 3.822,17.795 7.973,13.644 16.058,13.644 19.36,16.946 40.906,16.946 44.97,12.882 46.407,12.882 47.677,11.612 v1@47.764,11.612
  Bottom Layer w0.254: J2.24 44.97,10.85 46.407,10.85 47.169,11.612 v1@47.764,11.612
  other v1: 47.764,11.866
SYNC_OUT: J3.24 U3.2 | length 44.4
  Top Layer w0.254: U3.2@25.19,48.864 25.19,49.49 26.682,50.982 v2(26.682,54.792) ; v2(28.968,60.126) 28.994,60.126 29.705,60.837 29.705,70.979 37.223,78.497 37.223,81.843 38.747,83.367 41.033,83.367 J3.24
  Bottom Layer w0.254: v2(26.682,54.792) 26.682,55.808 26.936,56.062 26.954,56.062 28.968,58.076 v2(28.968,60.126)
TX: J2.23 J3.23 U3.30 | length 151.6
  Top Layer w0.254: U3.30@22.512,51.814 22.393,51.695 21.983,51.695 21.584,51.296 21.584,50.886 20.664,49.966 v1(20.586,49.966) 18.185,47.565 18.185,44.771 17.538,44.124 7.341,44.124 5.346,42.129 5.346,38.576 3.314,36.544 3.314,17.585 7.763,13.136 16.268,13.136 19.57,16.438 40.696,16.438 45.268,11.866 v1(45.986,11.866) ; v1(30.746,61.142) 30.238,61.65 30.238,62.658 30.23,62.666 30.23,70.786 37.35,77.906 40.906,77.906 J3.23
  Bottom Layer w0.254: v1(20.586,49.966) 19.824,50.728 19.824,52.76 26.428,59.364 26.428,61.817 27.023,62.412 29.476,62.412 v1(30.746,61.142) ; J2.23 41.16,7.04 41.16,8.91 44.116,11.866 v1(45.986,11.866)
VS: J1.44
pads on no net: J1.46 U3.1 U3.9 U3.11 U3.19 U3.22 U3.29 U3.31 U6.9 U12.11 U12.12 U12.13 U12.14 U13.11 U13.12 U13.13 U13.14 U14.11

## Polygon pours and split planes (outlines as drawn)
PGND on Top Layer "Top Layer-PGND" (solid, pour order 0): 100,90 0,90 0,0 100,0
PGND on Bottom Layer "PGND_L02_P002" (solid, pour order 2): 79,90 0,90 0,0 100,0 100,90

## Keep-outs
Keep-Out Layer:
  the board outline again, w0.254

## Silkscreen, mask and mechanical layers (free items; w line width, h text height)
Top Overlay:
  circle w0.254: c96,84 r3.683
  circle w0.254: c96,6 r3.683
  circle w0.254: c96,45 r3.683
  lines w0.254: 0,42 38,42 38,61 0,61 ; 34,61 34,90 ; 92.444,6.127 96.254,2.317 ; 92.444,45.127 96.254,41.317 ; 92.444,84.127 96.254,80.317 ; 92.571,4.857 94.857,2.571 ; 92.571,7.27 97.27,2.571 ; 92.571,43.857 94.857,41.571 ; 92.571,46.27 97.27,41.571 ; 92.571,82.857 94.857,80.571 ; 92.571,85.27 97.27,80.571 ; 93.079,8.159 93.079,8.032 98.032,3.079 ; 93.079,47.159 93.079,47.032 98.032,42.079 ; 93.079,86.159 93.079,86.032 98.032,81.079 ; 93.587,8.794 98.667,3.714 ; 93.587,47.794 98.667,42.714 ; 93.587,86.794 98.667,81.714 ; 94.476,9.175 99.302,4.349 ; 94.476,48.175 99.302,43.349 ; 94.476,87.175 99.302,82.349 ; 95.365,9.556 99.556,5.365 ; 95.365,48.556 99.556,44.365 ; 95.365,87.556 99.556,83.365 ; 96.635,9.556 99.619,6.572 ; 96.635,48.556 99.619,45.572 ; 96.635,87.556 99.619,84.572
  text "CC-BY-SA" at 92,77 h4 r270
  text "©2016 jaseg" at 95.5,77 h4 r270
  text "Bus master" at 11,75.5 h4
  text "Chain IN" at 48,71 h5
  text "DRIVERS" at 58.5,66.5 h4
  text "ROW 17-20 PULL" at 52.32,59.2 h4
  text "1" at 36,54.5 h1.02 r90
  text "CTRL" at 14.5,54 h4
  text "0" at 36.5,50 h1.02 r90
  text "conf" at 34.048,47.426 h1.02 r90
  text "ROW 9-16 PULL" at 52.32,47 h4
  text "Rev. .revision" at 89.5,39 h2.5 r270
  text "flipdot.jaseg.net" at 92,39 h4 r270
  text "FLIPDOT DRIVER THING" at 95.5,39 h4 r270
  text "ROW 17-20 PUSH" at 18,35 h4
  text "ROW 1-8 PULL" at 52.5,35 h4
  text "ROW 1-8 PUSH" at 17.903,20.5 h4
  text "ROW 9-16 PUSH" at 52.32,20.5 h4
  text "Chain OUT" at 47,13 h5
Mechanical 13:
  lines w0.254: 70.116,8.31 70.624,8.31 ; 70.116,81.97 70.624,81.97 ; 70.37,8.056 70.37,8.564 ; 70.37,81.716 70.37,82.224
  text "70.37,81.97 (mm)" at 70.624,81.97 h1.52
  text "70.37,8.31 (mm)" at 70.624,8.31 h1.52
Mechanical 16:
  drawing of 1874 lines, arcs and shapes, not listed
  text "1" at -59.754,130.611 h1.78
  text "2" at 12.89,130.611 h1.78
  text "3" at 86.042,130.611 h1.78
  text "4" at 158.94,130.611 h1.78
  text "A" at -94.095,107.599 h1.78
  text "A" at 192.925,107.599 h1.78
  text "B" at -94.095,59.542 h1.78
  text "B" at 192.925,59.542 h1.78
  text "C" at -94.095,11.028 h1.78
  text "C" at 192.925,11.028 h1.78
  text "ENGINEER:" at 77.99,-25.98 h1.14
  text "TITLE:" at 116.09,-25.98 h1.14
  text "PCB DESIGNER:" at 77.99,-33.473 h1.14
  text "D" at -94.095,-36.978 h1.78
  text "D" at 192.925,-36.978 h1.78
  text "DATE:" at 77.99,-41.22 h1.14
  text "PART NO.:" at 116.09,-41.22 h1.14
  text "REV:" at 169.43,-41.22 h1.14
  text "jaseg" at 44.97,-43.76 h1.78
  text ".PRINT_DATE" at 79.26,-44.268 h1.78
  text "Berlin" at 44.97,-46.3 h1.78
  text "FILE NAME:" at 77.99,-48.84 h1.14
  text "DWG NO:" at 116.09,-48.84 h1.14
  text "SCALE:" at 169.43,-48.84 h1.14
  text ".PCB_FILE_NAME_NO_PATH" at 79.26,-51.888 h1.78
  text "1" at -59.754,-57.349 h1.78
  text "2" at 12.89,-57.349 h1.78
  text "3" at 86.042,-57.349 h1.78
  text "4" at 158.94,-57.349 h1.78

## Dimensions
0,90 to 100,90 on Mechanical 13
100,90 to 100,0 on Mechanical 13
100,90 to 96,84 on Mechanical 13
96,84 to 96,45 on Mechanical 13
96,45 to 96,6 on Mechanical 13
96,6 to 100,0 on Mechanical 13
96,84 to 100,90 on Mechanical 13
96,84 to 87.515,80.7 on Mechanical 13